# EAGLE board lipol+2xsensor+action (EAGLE 7.2.0)
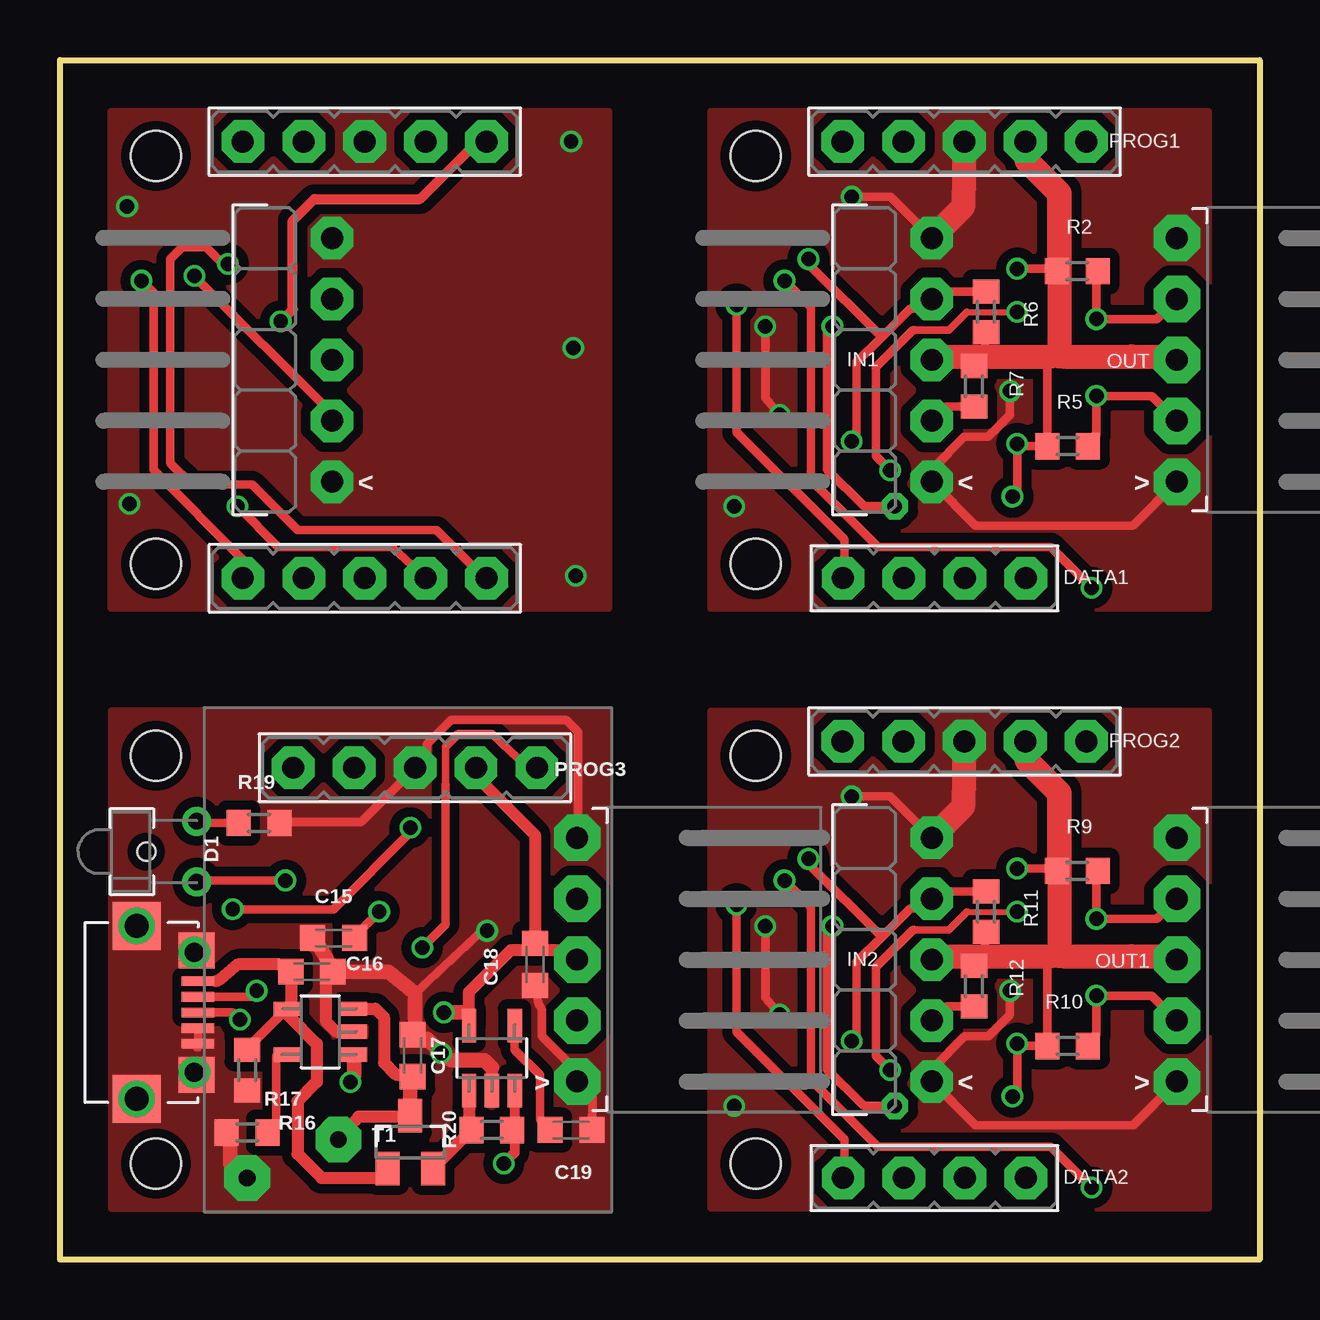
[diagram p0: board, top side]
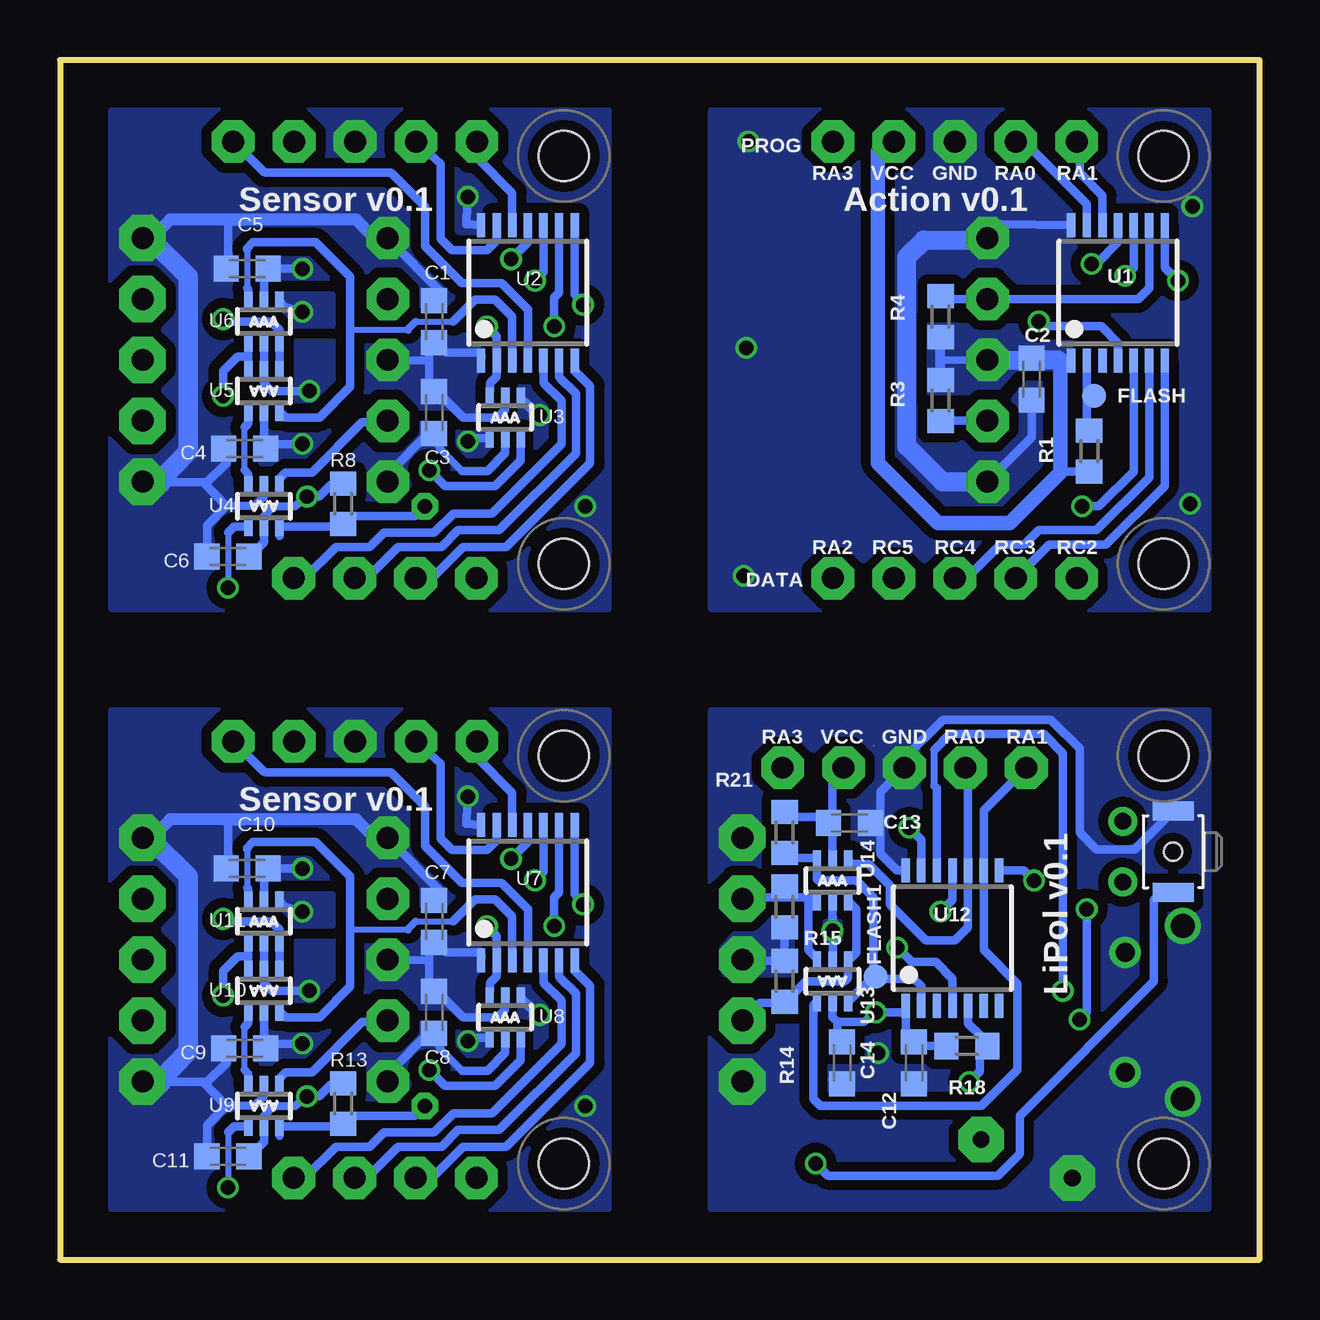
[diagram p1: board, bottom side, seen from below]

Size 50 x 50 mm. Coordinates in mm from the lower left corner, seen from the top.
Outline: 0,0 0,50 50,50 50,0 0,0
Copper layers (1*16): Top 0.035mm / dielectric 1.5mm / Bottom 0.035mm
Design rules "SeeedStudio_2layer_DRU_no_angle_20140221": minimum track width 6mil, minimum drill 12mil, track to track 6mil, track to pad 6mil, pad to pad 6mil, via to via 6mil, smd to smd 0mil, copper to edge 10mil, drill to drill 10mil, minimum pad ring 10mil, minimum via ring 6mil, stop-mask expansion 2mil, vias tented up to drill 100mil, thermal gap 10mil
Holes 2.1 mm at 4,46 4,29 29,46 29,29 29,21 29,4 4,21 4,4

## Footprints (pad centres in the part's own frame; a part is rotated, then mirrored left to right if it is on the bottom)
C0603K = smd 1.05 x 1.08: 1 -0.875,0; 2 0.875,0
LED1.8 = drill 0.7: A -1.27,-0.4; K 1.27,-0.4
JUMPER5M = drill 0.914 pad 1.778 octagon: 1 -5.08,0; 2 -2.54,0; 3 0,0; 4 2.54,0; 5 5.08,0
JUMPER4M = drill 0.914 pad 1.778 octagon: 1 -3.81,0; 2 -1.27,0; 3 1.27,0; 4 3.81,0
TP10R = smd 1 x 1: TP 0,0
JUMPER5M-90 = drill 0.914 pad 1.778 octagon: 1 -5.08,-2.54; 2 -2.54,-2.54; 3 0,-2.54; 4 2.54,-2.54; 5 5.08,-2.54
SOT23-5 = smd 0.6 x 1.1: 1 -0.95,-1.45; 2 0,-1.45; 3 0.95,-1.45; 4 0.95,1.35; 5 -0.95,1.35
JUMPER5F-90 = drill 0.914 pad 1.93 octagon: 1 5.08,-2.54; 2 2.54,-2.54; 3 0,-2.54; 4 -2.54,-2.54; 5 -5.08,-2.54
R0603 = smd 1 x 1.1: 1 -0.85,0; 2 0.85,0
BUTTON-B3U = smd 0.8 x 1.7: P$1 -1.7,0; P$2 1.7,0 | hole 0.75: 0,0
SOT23 = smd 1 x 1.4: D 0,1.1; G -0.95,-1.1; S 0.95,-1.1
SOT32-5 = smd 0.6 x 1.4: BP 0.95,1.35; GND 0,-1.35; SHDN 0.95,-1.35; VIN -0.95,-1.35; VOUT -0.95,1.35
TSSOP14 = smd 0.35 x 1: 1 -1.95,-2.825; 2 -1.3,-2.825; 3 -0.65,-2.825; 4 0,-2.825; 5 0.65,-2.825; 6 1.3,-2.825; 7 1.95,-2.825; 8 1.95,2.825; 9 1.3,2.825; 10 0.65,2.825; 11 0,2.825; 12 -0.65,2.825; 13 -1.3,2.825; 14 -1.95,2.825
SC70-6L = smd 0.35 x 0.8: 1 -0.65,-0.85; 2 0,-0.85; 3 0.65,-0.85; 4 0.65,0.85; 5 0,0.85; 6 -0.65,0.85
LIPOL_21X17 = drill 0.7 pad 1.9 octagon: GND 6.3,9.7; VBAT 2.5,8.1
MICROUSB-MOLEX = smd 0.4 x 1.35: D+ 0,2.35; D- -0.65,2.35; GND 1.3,2.35; NC 0.65,2.35; VUSB -1.3,2.35 | smd 2 x 2: GND1 -3.6,-0.2; GND2 3.6,-0.2 | smd 1.5 x 1.5: GND3 -2.59,2.3; GND4 2.6,2.3 | drill 1: P$1 -3.6,-0.2; P$2 3.6,-0.2 | drill 0.8: P$3 -2.5,2.2; P$6 2.5,2.2

## Placement (x,y rotation side)
C1  100n  [C0603K]  34.4,39.1 90 bottom
C2  100n  [C0603K]  9.5,36.7 270 bottom
C3  100n  [C0603K]  34.4,35.3 270 bottom
C4  100n  [C0603K]  42.3,33.8 0 bottom
C5  100n  [C0603K]  42.2,41.3 0 bottom
C6  100n  [C0603K]  43,29.3 180 bottom
C7  100n  [C0603K]  34.4,14.1 90 bottom
C8  100n  [C0603K]  34.4,10.3 270 bottom
C9  100n  [C0603K]  42.3,8.8 0 bottom
C10  100n  [C0603K]  42.2,16.3 0 bottom
C11  100n  [C0603K]  43,4.3 180 bottom
C12  100n  [C0603K]  14.4,8.2 270 bottom
C13  100n  [C0603K]  17.1,18.2 180 bottom
C14  100n  [C0603K]  17.4,8.2 90 bottom
C15  100n  [C0603K]  11.4,13.4 180 top
C16  4.7u  [C0603K]  10.5,12 180 top
C17  4.7u  [C0603K]  14.7,8.5 270 top
C18  4.7u  [C0603K]  19.8,12.3 90 top
C19  470p  [C0603K]  21.3,5.4 180 top
D1  LED1.8  [LED1.8]  5.3,17 90 top
DATA  JUMPER5M  [JUMPER5M]  12.7,28.4 0 top
DATA1  JUMPER4M  [JUMPER4M]  36.45,28.4 0 top
DATA2  JUMPER4M  [JUMPER4M]  36.45,3.4 0 top
FLASH  TPTP10R  [TP10R]  6.9,36 0 bottom
FLASH1  TPTP10R  [TP10R]  16,11.8 0 bottom
IN  JUMPER5M-90  [JUMPER5M-90]  8.8,37.5 90 top
IN1  JUMPER5M-90  [JUMPER5M-90]  33.8,37.5 90 top
IN2  JUMPER5M-90  [JUMPER5M-90]  33.8,12.5 90 top
MCP73832  MCP73831  [SOT23-5]  10.8,9.5 90 top
OUT  JUMPER5F-90  [JUMPER5F-90]  49.1,37.5 270 top
OUT1  JUMPER5F-90  [JUMPER5F-90]  49.1,12.5 270 top
OUT2  JUMPER5F-90  [JUMPER5F-90]  24.1,12.5 270 top
PROG  JUMPER5M  [JUMPER5M]  12.7,46.6 180 top
PROG1  JUMPER5M  [JUMPER5M]  37.7,46.6 180 top
PROG2  JUMPER5M  [JUMPER5M]  37.7,21.6 180 top
PROG3  JUMPER5M  [JUMPER5M]  14.8,20.5 180 top
R1  100k  [R0603]  7.1,33.7 90 bottom
R2  2k2  [R0603]  42.4,41.2 180 top
R3  2K2  [R0603]  13.3,35.8 90 bottom
R4  2k2  [R0603]  13.3,39.3 270 bottom
R5  2k2  [R0603]  42,33.9 180 top
R6  2K2  [R0603]  38.6,39.5 270 top
R7  2k2  [R0603]  38.1,36.4 90 top
R8  100k  [R0603]  38.2,31.5 90 bottom
R9  2k2  [R0603]  42.4,16.2 180 top
R10  2k2  [R0603]  42,8.9 180 top
R11  2K2  [R0603]  38.6,14.5 270 top
R12  2k2  [R0603]  38.1,11.4 90 top
R13  100k  [R0603]  38.2,6.5 90 bottom
R14  2k2  [R0603]  19.8,11.6 90 bottom
R15  2k2  [R0603]  19.8,14.7 270 bottom
R16  22k  [R0603]  7.8,5.3 0 top
R17  100k  [R0603]  7.8,7.9 90 top
R18  100k  [R0603]  12.2,8.9 0 bottom
R19  2k2  [R0603]  8.3,18.2 180 top
R20  100k  [R0603]  18,5.4 0 top
R21  100k  [R0603]  19.8,17.8 270 bottom
RESET  BYTTON-B3U  [BUTTON-B3U]  3.6,17 270 bottom
T1  FDV304P  [SOT23]  14.6,4.9 0 top
TC1185  TC1185  [SOT32-5]  18,8.4 0 top
U1  16F103  [TSSOP14]  5.9,40.3 0 bottom
U2  16F103  [TSSOP14]  30.5,40.3 0 bottom
U3  NC7SB3157P6X  [SC70-6L]  31.45,35.1 0 bottom
U4  NC7SB3157P6X  [SC70-6L]  41.5,31.4 180 bottom
U5  NC7SB3157P6X  [SC70-6L]  41.5,36.2 180 bottom
U6  NC7SB3157P6X  [SC70-6L]  41.5,39.1 0 bottom
U7  16F103  [TSSOP14]  30.5,15.3 0 bottom
U8  NC7SB3157P6X  [SC70-6L]  31.45,10.1 0 bottom
U9  NC7SB3157P6X  [SC70-6L]  41.5,6.4 180 bottom
U10  NC7SB3157P6X  [SC70-6L]  41.5,11.2 180 bottom
U11  NC7SB3157P6X  [SC70-6L]  41.5,14.1 0 bottom
U12  16F1454  [TSSOP14]  12.8,13.4 0 bottom
U13  NC7SB3157P6X  [SC70-6L]  17.8,11.6 180 bottom
U14  NC7SB3157P6X  [SC70-6L]  17.8,15.8 0 bottom
U$3  LIPOL_21X17  [LIPOL_21X17]  14.1,13.1 180 top
USB  USBMICRO  [MICROUSB-MOLEX]  3.4,10.3 270 top

## Library data of the parts
C1-C19 R1-R21 = resistor
D1 DATA DATA1 DATA2 IN IN1 IN2 MCP73832 OUT OUT1 OUT2 PROG PROG1-PROG3 RESET T1 TC1185 U1-U14 U$3 USB = !stavebnice03
FLASH FLASH1 = testpad

## Nets
GND: C2.2 IN.1 IN.5 PROG.3 U1.14
GND11: C1.2 C3.2 C4.1 C5.1 C6.2 IN1.1 IN1.5 OUT.1 OUT.5 PROG1.3 U2.14 U3.2 U4.2 U5.2 U6.2
GND12: C7.2 C8.2 C9.1 C10.1 C11.2 IN2.1 IN2.5 OUT1.1 OUT1.5 PROG2.3 U7.14 U8.2 U9.2 U10.2 U11.2
GND13: C12.2 C13.1 C14.1 C15.2 C16.1 C17.1 C18.1 C19.1 MCP73832.2 OUT2.1 OUT2.5 PROG3.3 R16.1 R17.1 R19.1 RESET.P$1 TC1185.GND U12.14 U13.2 U14.2 U$3.GND USB.GND USB.GND1 USB.GND2 USB.GND3 USB.GND4 USB.NC USB.P$1 USB.P$2 USB.P$3 USB.P$6
N$2: IN.2 R3.1 U1.10
N$3: DATA.2 U1.7
N$4: FLASH.TP R1.2 U1.2
N$5: IN.4 R4.1 U1.9
N$6: PROG1.1 U2.4
N$7: PROG1.4 U2.13
N$9: PROG1.5 U2.12
N$10: IN1.4 R6.1 U2.11 U3.1
N$11: DATA.5 U1.11
N$12: DATA.4 U1.5
N$13: PROG.1 U1.4
N$14: PROG.4 U1.13
N$15: PROG.5 U1.12
N$17: DATA.3 U1.6
N$18: DATA.1 U1.8
N$20: DATA1.1 U2.8
N$21: DATA1.3 U2.6
N$22: DATA1.4 U2.5
N$23: R8.1 U2.2 U3.6 U4.6
N$24: OUT.2 R5.1 U5.3 U6.1
N$25: OUT.4 R2.1 U5.1 U6.3
N$26: IN1.2 R7.1 U4.1
N$27: U4.3 U5.4
N$28: U3.3 U6.4
N$29: U2.3 U5.6 U6.6
N$31: U2.10 U4.4
N$33: U2.9 U3.4
N$34: DATA1.2 U2.7
N$35: PROG2.1 U7.4
N$36: PROG2.4 U7.13
N$37: PROG2.5 U7.12
N$38: IN2.4 R11.1 U7.11 U8.1
N$39: DATA2.1 U7.8
N$40: DATA2.3 U7.6
N$41: DATA2.4 U7.5
N$42: R13.1 U7.2 U8.6 U9.6
N$43: OUT1.2 R10.1 U10.3 U11.1
N$44: OUT1.4 R9.1 U10.1 U11.3
N$45: IN2.2 R12.1 U9.1
N$46: U9.3 U10.4
N$47: U8.3 U11.4
N$48: U7.3 U10.6 U11.6
N$49: U7.10 U9.4
N$50: U7.9 U8.4
N$51: DATA2.2 U7.7
N$52: OUT2.4 R15.1 U13.3 U14.1
N$53: OUT2.2 R14.1 U13.1 U14.3
N$54: PROG3.5 U12.9 U13.4
N$55: FLASH1.TP R21.2 U12.2 U13.6 U14.6
N$56: U12.12 USB.D-
N$57: U12.13 USB.D+
N$58: C15.1 U12.11
N$59: PROG3.4 U12.10 U14.4
N$60: C17.2 MCP73832.3 T1.D U$3.VBAT
N$61: C16.2 MCP73832.4 R17.2 T1.G USB.VUSB
N$62: MCP73832.5 R16.2
N$63: R20.1 T1.S TC1185.VIN
N$64: MCP73832.1 R18.2 U12.5
N$65: PROG3.1 U12.4
N$66: D1.K R19.2
N$67: D1.A U12.8
N$68: C19.2 TC1185.BP
N$69: R20.2 RESET.P$2 TC1185.SHDN
VCC: C2.1 IN.3 PROG.2 R1.1 R3.2 R4.2 U1.1
VCC1: C1.1 C3.1 C4.2 C5.2 C6.1 IN1.3 OUT.3 PROG1.2 R2.2 R5.2 R6.2 R7.2 R8.2 U2.1 U3.5 U4.5 U5.5 U6.5
VCC2: C7.1 C8.1 C9.2 C10.2 C11.1 IN2.3 OUT1.3 PROG2.2 R9.2 R10.2 R11.2 R12.2 R13.2 U7.1 U8.5 U9.5 U10.5 U11.5
VCC3: C12.1 C13.2 C14.2 C18.2 OUT2.3 PROG3.2 R14.2 R15.2 R18.1 R21.1 TC1185.VOUT U12.1 U13.5 U14.5

## Tracks (layer width: path | path; a pad name or v marks a point on that pad's centre or on a via)
GND  (via drill 0.6)
  Bottom 0.356: C2.2 9.5,34.28 IN.1 | 11.5,42.5 11.4,42.6 | U1.14 10.78,43.16 IN.5
  Bottom 0.8: 11.5,42.5 14,42.5 14.7,41.8 14.7,33.9 13.22,32.42 IN.1
  other vias: 2.9,31.5 21.4,38 21.3,46.6 21.5,28.5 2.8,43.9
  pour Top (isolate 0.406, rank 2, no thermals): 2.1,27.1 2.1,47.9 22.9,47.9 22.9,27.1
  pour Bottom (isolate 0.406, rank 2, no thermals): 2.1,27.1 2.1,47.9 22.9,47.9 22.9,27.1
GND11  (via drill 0.6)
  Top 0.356: v33,44.3 34.61,44.29 IN1.5 | 46.7,32.38 OUT.1 44.74,30.6 38.16,30.6 IN1.1 36.4,32.48 36.4,33 37.7,34.3 38.7,34.3 39.6,35.2 v39.6,36.2
  Top 1: PROG1.3 37.65,43.89 IN1.5
  Bottom 0.305: 33.25,32.87 34.14,33.77
  Bottom 0.33: 41.5,31.8 41.9,31.4
  Bottom 0.34: U4.2 41.5,31.8 | 41.9,31.4 43.08,31.4
  Bottom 0.356: U6.2 U5.2 41.49,36.52 41.17,36.2 v39.6,36.2 | C4.1 43.06,33.2 43.87,32.4 44.03,32.4 | 44.03,32.4 45.89,32.4 | U2.14 33.06,43.16 v33,44.3 | 44.03,32.4 43.08,31.4 43.88,30.6 C6.2 | U3.2 31.45,33.61 32.18,32.87 33.25,32.87 | 34.14,33.77 C3.2 34.68,34.41 36.21,32.87 IN1.1 | C1.2 34.04,40.23 IN1.5 | C5.1 43,41.35 43,43.35
  Bottom 0.5: 42.28,43.35 37.65,43.35 36.88,42.58 | 42.28,43.35 43,43.35 45.41,43.35 46.27,42.5 | 42.97,43.35 42.28,43.35
  Bottom 0.8: 44.66,40.97 46.19,42.5 46.27,42.5 46.6,42.5
  Bottom 0.813: 44.66,40.97 44.66,33.67 45.89,32.4
  Bottom 1.016: 45.89,32.4 OUT.1
  other vias: 28.1,31.4
  pour Top (isolate 0.42, rank 3, no thermals): 27.1,27.1 27.1,47.9 47.9,47.9 47.9,27.1
  pour Bottom (isolate 0.43, rank 2, no thermals): 27.1,27.1 27.1,47.9 47.9,47.9 47.9,27.1
GND12  (via drill 0.6)
  Top 0.356: v33,19.3 34.61,19.29 IN2.5 | 46.7,7.38 OUT1.1 44.74,5.6 38.16,5.6 IN2.1 36.4,7.48 36.4,8 37.7,9.3 38.7,9.3 39.6,10.2 v39.6,11.2
  Top 1: PROG2.3 37.65,18.89 IN2.5
  Bottom 0.305: 33.25,7.87 34.14,8.77
  Bottom 0.33: 41.5,6.8 41.9,6.4
  Bottom 0.34: U9.2 41.5,6.8 | 41.9,6.4 43.08,6.4
  Bottom 0.356: U11.2 U10.2 41.49,11.53 41.17,11.2 v39.6,11.2 | C9.1 43.06,8.21 43.87,7.4 44.03,7.4 | 44.03,7.4 45.89,7.4 | U7.14 33.06,18.16 v33,19.3 | 44.03,7.4 43.08,6.4 43.88,5.6 C11.2 | U8.2 31.45,8.61 32.18,7.87 33.25,7.87 | 34.14,8.77 C8.2 34.68,9.4 36.21,7.87 IN2.1 | C7.2 34.04,15.23 IN2.5 | C10.1 43,16.35 43,18.35
  Bottom 0.5: 42.28,18.35 37.65,18.35 36.88,17.58 | 42.28,18.35 43,18.35 45.41,18.35 46.27,17.5 | 42.97,18.35 42.28,18.35
  Bottom 0.8: 44.66,15.97 46.19,17.5 46.27,17.5 46.6,17.5
  Bottom 0.813: 44.66,15.97 44.66,8.67 45.89,7.4
  Bottom 1.016: 45.89,7.4 OUT1.1
  other vias: 28.1,6.4
  pour Top (isolate 0.42, rank 3, no thermals): 27.1,2.1 27.1,22.9 47.9,22.9 47.9,2.1
  pour Bottom (isolate 0.43, rank 2, no thermals): 27.1,2.1 27.1,22.9 47.9,22.9 47.9,2.1
GND13  (via drill 0.6)
  Top 0.356: 21.64,7.4 OUT2.1 | 7.03,5.52 R16.1 | 11.1,12.25 C16.1 | v17.8,13.7 17.6,13.7 14.8,11.1 | OUT2.1 21.66,7.74 20.1,9.3 20.1,10.4 19.95,10.65 C18.1 | C19.1 22.2,6.78 OUT2.1 | R19.1 9.2,18.25 12.55,18.25 PROG3.3 15.3,20.9 15.3,21.5 16.3,22.5 21.1,22.5 21.6,22 21.6,17.6 | 5.75,8.85 5.7,8.85 USB.GND USB.NC
  Top 0.5: MCP73832.2 11.5,9.5 11.1,9.9 11.1,12.25 | TC1185.GND 18,8
  Top 0.6: U$3.GND 7.1,4 7.1,5.52 7.03,5.52 | C15.2 10.55,13.45 11.1,12.6 11.1,12.55 C16.1 13.7,12 14.8,11.1 14.8,9.47 | 18,8 17.7,8.3 16.3,8.3 v15.9,8.6 15.3,9.2 14.8,9.2 14.8,9.47 | 14.8,9.47 C17.1
  Bottom 0.356: C14.1 17.15,7.45 | U12.14 15.12,16.23 15.8,16.9 15.8,19.5 PROG3.3 14.8,20.9 13.2,22.5 8.7,22.5 7.5,21.3 7.5,17.8 6.8,17.1 5.2,17.1 RESET.P$1 3.5,18.6
  Bottom 0.357: v17.8,13.7 17.79,12.81 U14.2 17.79,13.71 v17.8,13.7 | U13.2 17.79,12.79 v17.8,13.7 | C14.1 17.8,7.5
  pour Bottom (isolate 0.41, rank 2, no thermals): 2.1,2.1 2.1,22.9 22.9,22.9 22.9,2.1
  pour Top (isolate 0.4, rank 2, no thermals): 2.1,2.1 22.9,2.1 22.9,22.9 2.1,22.9
N$2  (via drill 0.6)
  Top 0.356: IN.2 11.34,35.26 v5.6,41
  Bottom 0.356: IN.2 R3.1 | U1.10 5.25,41.35 v5.6,41
  Bottom 0.406: R3.1
N$3
  Bottom 0.35: 6.4,29.8 8.76,29.8 DATA.2
  Bottom 0.356: U1.7 3.95,32.25 6.4,29.8
N$4
  Bottom 0.356: R1.2 7.05,34.55 7.2,34.7 7.2,35.8 | 7.2,35.8 U1.2 | FLASH.TP 7.1,35.9 7.2,35.8
N$5
  Bottom 0.356: U1.9 4.6,40.5 5.06,40.04 IN.4 13.19,40.04 R4.1
N$6
  Bottom 0.35: 41.5,45.32 PROG1.1
  Bottom 0.356: U2.4 30.5,39.61 30.51,39.61 31.6,40.7 33.24,40.7 34.78,42.24 | 41.4,45.3 41.5,45.32
  Bottom 0.357: 34.78,42.24 34.78,43.88 36.2,45.3 41.4,45.3
N$7
  Bottom 0.35: 34.14,45.63 34.14,45.68 PROG1.4
  Bottom 0.356: 34.14,45.63 34.14,42.56 33.65,42.06 32.2,42.06 31.8,42.46 U2.13
N$9
  Bottom 0.356: U2.12 31.15,44.45 32.6,45.9 32.6,46.63 PROG1.5
N$10  (via drill 0.6)
  Top 0.356: R6.1 36.65,40.35 IN1.4 35.94,39.64 35.44,39.64 34.25,38.45 | 34.25,38.45 33.2,37.4 33.2,34.3 v33,34.1 | v31.2,41.7 31.2,41.5 34.25,38.45
  Bottom 0.356: U3.1 32.65,34.25 v33,34.1 | U2.11 30.5,42.4 v31.2,41.7
  pour Bottom (isolate 0.356, no thermals): 31.9,34.6 31.9,33.6 32.1,33.4 33.2,33.4 33.5,33.7 33.5,34.6
N$11  (via drill 0.6)
  Top 0.35: 15.7,30.4 17.78,28.32 DATA.5
  Top 0.356: 15.7,30.4 9.9,30.4 8,32.3 5.5,32.3 4.6,33.2 4.6,41.7 5.1,42.2 6.1,42.2 6.8,41.5 v7,41.5
  Bottom 0.356: U1.11 5.9,42.4 6.8,41.5 v7,41.5
N$12  (via drill 0.6)
  Top 0.35: 9.1,29.7 13.84,29.7 DATA.4
  Top 0.356: v7.4,31.4 9.1,29.7
  Bottom 0.356: U1.5 5.25,32.85 6.7,31.4 v7.4,31.4
N$13  (via drill 0.6)
  Top 0.406: v9.2,39.1 9.7,39.6 9.7,43.3 10.6,44.2 15,44.2 17.3,46.5 17.58,46.5 PROG.1
  Bottom 0.356: U1.4 5.9,38.2 6.6,38.9 9,38.9 v9.2,39.1
N$14
  Bottom 0.35: 7.8,44.6 9.8,46.6 PROG.4
  Bottom 0.356: 7.8,44.6 7.2,44 U1.13
N$15
  Bottom 0.356: U1.12 6.55,44.35 7.5,45.3 7.5,46.48 PROG.5
N$17
  Bottom 0.356: U1.6 4.6,32.6 6.8,30.4 9.2,30.4 9.8,29.8 10.8,29.8 12.2,28.4 DATA.3
N$18  (via drill 0.6)
  Top 0.35: 3.9,32.9 7.62,29.18 DATA.1
  Top 0.356: 3.9,32.9 3.9,40.3 v3.4,40.8
  Bottom 0.356: U1.8 3.95,41.35 v3.4,40.8
N$20  (via drill 0.6)
  Top 0.35: 32.69,30.01 32.69,28.35 DATA1.1
  Top 0.356: 32.69,30.01 28.2,34.5 v28.2,39.8
  Bottom 0.356: U2.8 28.55,40.25 v28.2,39.8
N$21
  Bottom 0.356: 28.5,33.92 28.5,33.6 31.7,30.4 33.4,30.4 34.1,29.7 35.9,29.7 37.2,28.4 DATA1.3 | U2.6 29.2,36.8 29.17,36.77
  Bottom 0.357: 29.17,36.77 28.5,36.1 28.5,33.92
N$22
  Bottom 0.356: U2.5 29.85,36.55 29.82,36.52 | 29.1,34 32,31.1 33.6,31.1 34.4,30.3 36.5,30.3 37.1,29.7 38.5,29.7 39.8,28.4 DATA1.4
  Bottom 0.357: 29.1,34 29.1,35.8 29.82,36.52
N$23  (via drill 0.6, 0.6 pad 1.1)
  Top 0.356: v32.2,38.9 31.96,38.76 31.96,32.94 33.5,31.4 v34.8,31.4
  Bottom 0.356: v32.2,38.9 31.8,38.5 U2.2 31.8,36.8 32.08,36.52 32.08,36.28 U3.6 | 40.85,30.15 U4.6 38.6,30.55 R8.1 | 38.25,30.6 R8.1 | R8.1 38.05,30.9 37.9,30.9 37.8,31 35.2,31 v34.8,31.4
N$24  (via drill 0.6)
  Top 0.356: 43.17,34.43 R5.1 43.2,34.35 v43.2,36 45.5,36 46.54,34.96 OUT.2
  Bottom 0.356: v43.2,36 43.2,37.03 42.6,37.64 42.19,37.64 42.15,37.6 | U6.1 42.15,37.6 | 42.15,37.6 U5.3
N$25  (via drill 0.6)
  Top 0.356: OUT.4 46.57,40.06 45.71,39.2 v43.2,39.2 43.2,41.19 R2.1
  Bottom 0.356: U5.1 U6.3 40.85,38.74 41.2,39.1 43.12,39.1 v43.2,39.2
N$26
  Top 0.357: R7.1 36.95,35.55 IN1.2
  Bottom 0.356: U4.1 40.85,32.55 40.6,32.8 39.5,32.8 37.4,34.9 36.4,34.9 IN1.2
N$27
  Bottom 0.254: 42.3,32.9 42.3,34.7
  Bottom 0.356: U5.4 42.15,34.84 42.3,34.7 | U4.3 42.15,32.75 42.3,32.9
N$28  (via drill 0.6)
  Top 0.254: 37.8,39.5 v39.9,39.5
  Top 0.305: 35.61,38.75 37.05,38.75 37.8,39.5
  Top 0.356: 35.61,38.75 35.55,38.75 34,37.2 34,33.5 v34.6,32.9
  Bottom 0.356: v39.9,39.5 40.62,39.7 U6.4 | U3.3 30.8,33.31 31.86,32.24 33.94,32.24 v34.6,32.9
  pour Bottom (isolate 0.406, no thermals): 40.85,40.23 38.64,40.23 38.64,38.91 40.48,38.91 40.85,39.38
N$29
  Bottom 0.254: 35.18,39.1 33.61,39.1 | 35.5,38.75 37.9,38.75 | 42.2,42.1 42.2,40.5
  Bottom 0.304: 35.5,38.75 35.5,38.78
  Bottom 0.305: 35.5,38.78 35.18,39.1
  Bottom 0.356: U2.3 31.15,39.3 31.86,40.02 32.69,40.02 33.61,39.1 | 42.2,42.1 42.2,42.16 41.96,42.4 39.34,42.4 37.91,40.96 37.9,38.75 37.9,36.38 39.18,35.1 40.6,35.1 U5.6 | U6.6 42.15,40.45 42.2,40.5
N$31  (via drill 0.6)
  Top 0.356: v30.2,40.8 31.3,39.7 31.3,32.5 34.1,29.7 | 40.8,29.7 41.3,29.7 v43,28
  Top 0.357: 40.8,29.7 34.1,29.7
  Bottom 0.254: 43,30.3 v43,28
  Bottom 0.356: v30.2,40.8 29.85,41.15 U2.10 | U4.4 42.75,30.55 43,30.3
N$33  (via drill 0.6)
  Top 0.356: v30,35.2 29.4,35.9 v29.4,38.9
  Bottom 0.356: U3.4 30.71,35.79 | U2.9 29.2,40.3 29.4,40.1 v29.4,38.9
  Bottom 0.406: 30.71,35.79 v30,35.2
  pour Bottom (isolate 0.356, no thermals): 29.6,33.64 30.87,33.64 30.97,36.37 29.7,36.37
  pour Top (isolate 0.406, rank 2, no thermals): 28.5,39.5 31.1,39.5 31.1,32.1 28.4,34.4
N$34
  Bottom 0.356: 28.55,37.25 U2.7 28.55,37.05 27.9,36.4 27.9,33.2 | 31.4,29.7 33.2,29.7 34.5,28.4 DATA1.2
  Bottom 0.357: 27.9,33.2 31.4,29.7
N$35
  Bottom 0.35: 41.5,20.32 PROG2.1
  Bottom 0.356: U7.4 30.5,14.61 30.51,14.61 31.6,15.7 33.24,15.7 34.78,17.24 | 41.4,20.3 41.5,20.32
  Bottom 0.357: 34.78,17.24 34.78,18.88 36.2,20.3 41.4,20.3
N$36
  Bottom 0.35: 34.14,20.63 34.14,20.68 PROG2.4
  Bottom 0.356: 34.14,20.63 34.14,17.56 33.65,17.06 32.2,17.06 31.8,17.46 U7.13
N$37
  Bottom 0.356: U7.12 31.15,19.45 32.6,20.9 32.6,21.63 PROG2.5
N$38  (via drill 0.6)
  Top 0.356: R11.1 36.65,15.35 IN2.4 35.94,14.64 35.44,14.64 34.25,13.45 | 34.25,13.45 33.2,12.4 33.2,9.3 v33,9.1 | v31.2,16.7 31.2,16.5 34.25,13.45
  Bottom 0.356: U8.1 32.65,9.25 v33,9.1 | U7.11 30.5,17.4 v31.2,16.7
  pour Bottom (isolate 0.356, no thermals): 31.9,9.6 31.9,8.6 32.1,8.4 33.2,8.4 33.5,8.7 33.5,9.6
N$39  (via drill 0.6)
  Top 0.35: 32.69,5.01 32.69,3.35 DATA2.1
  Top 0.356: 32.69,5.01 28.2,9.5 v28.2,14.8
  Bottom 0.356: U7.8 28.55,15.25 v28.2,14.8
N$40
  Bottom 0.356: 28.5,8.92 28.5,8.6 31.7,5.4 33.4,5.4 34.1,4.7 35.9,4.7 37.2,3.4 DATA2.3 | U7.6 29.2,11.8 29.17,11.77
  Bottom 0.357: 29.17,11.77 28.5,11.1 28.5,8.92
N$41
  Bottom 0.356: U7.5 29.85,11.55 29.82,11.52 | 29.1,9 32,6.1 33.6,6.1 34.4,5.3 36.5,5.3 37.1,4.7 38.5,4.7 39.8,3.4 DATA2.4
  Bottom 0.357: 29.1,9 29.1,10.8 29.82,11.52
N$42  (via drill 0.6, 0.6 pad 1.1)
  Top 0.356: v32.2,13.9 31.96,13.76 31.96,7.94 33.5,6.4 v34.8,6.4
  Bottom 0.356: v32.2,13.9 31.8,13.5 U7.2 31.8,11.8 32.08,11.53 32.08,11.28 U8.6 | 40.85,5.15 U9.6 38.6,5.55 R13.1 | 38.25,5.6 R13.1 | R13.1 38.05,5.9 37.9,5.9 37.8,6 35.2,6 v34.8,6.4
N$43  (via drill 0.6)
  Top 0.356: 43.17,9.43 R10.1 43.2,9.35 v43.2,11 45.5,11 46.54,9.96 OUT1.2
  Bottom 0.356: v43.2,11 43.2,12.04 42.6,12.64 42.19,12.64 42.15,12.6 | U11.1 42.15,12.6 | 42.15,12.6 U10.3
N$44  (via drill 0.6)
  Top 0.356: OUT1.4 46.57,15.06 45.71,14.2 v43.2,14.2 43.2,16.18 R9.1
  Bottom 0.356: U10.1 U11.3 40.85,13.74 41.2,14.1 43.12,14.1 v43.2,14.2
N$45
  Top 0.357: R12.1 36.95,10.55 IN2.2
  Bottom 0.356: U9.1 40.85,7.55 40.6,7.8 39.5,7.8 37.4,9.9 36.4,9.9 IN2.2
N$46
  Bottom 0.254: 42.3,7.9 42.3,9.7
  Bottom 0.356: U10.4 42.15,9.85 42.3,9.7 | U9.3 42.15,7.75 42.3,7.9
N$47  (via drill 0.6)
  Top 0.254: 37.8,14.5 v39.9,14.5
  Top 0.305: 35.61,13.75 37.05,13.75 37.8,14.5
  Top 0.356: 35.61,13.75 35.55,13.75 34,12.2 34,8.5 v34.6,7.9
  Bottom 0.356: v39.9,14.5 40.62,14.7 U11.4 | U8.3 30.8,8.31 31.86,7.24 33.94,7.24 v34.6,7.9
  pour Bottom (isolate 0.406, no thermals): 40.85,15.23 38.64,15.23 38.64,13.91 40.48,13.91 40.85,14.38
N$48
  Bottom 0.254: 35.18,14.1 33.61,14.1 | 35.5,13.75 37.9,13.75 | 42.2,17.1 42.2,15.5
  Bottom 0.304: 35.5,13.75 35.5,13.78
  Bottom 0.305: 35.5,13.78 35.18,14.1
  Bottom 0.356: U7.3 31.15,14.3 31.86,15.02 32.69,15.02 33.61,14.1 | 42.2,17.1 42.2,17.16 41.96,17.4 39.34,17.4 37.91,15.96 37.9,13.75 37.9,11.38 39.18,10.1 40.6,10.1 U10.6 | U11.6 42.15,15.45 42.2,15.5
N$49  (via drill 0.6)
  Top 0.356: v30.2,15.8 31.3,14.7 31.3,7.5 34.1,4.7 | 40.8,4.7 41.3,4.7 v43,3
  Top 0.357: 40.8,4.7 34.1,4.7
  Bottom 0.254: 43,5.3 v43,3
  Bottom 0.356: v30.2,15.8 29.85,16.15 U7.10 | U9.4 42.75,5.55 43,5.3
N$50  (via drill 0.6)
  Top 0.356: v30,10.2 29.4,10.9 v29.4,13.9
  Bottom 0.356: U8.4 30.71,10.79 | U7.9 29.2,15.3 29.4,15.1 v29.4,13.9
  Bottom 0.406: 30.71,10.79 v30,10.2
  pour Bottom (isolate 0.356, no thermals): 29.6,8.64 30.87,8.64 30.97,11.37 29.7,11.37
  pour Top (isolate 0.406, rank 2, no thermals): 28.5,14.5 31.1,14.5 31.1,7.1 28.4,9.4
N$51
  Bottom 0.356: 28.55,12.25 U7.7 28.55,12.05 27.9,11.4 27.9,8.2 | 31.4,4.7 33.2,4.7 34.5,3.4 DATA2.2
  Bottom 0.357: 27.9,8.2 31.4,4.7
N$52
  Bottom 0.356: U13.3 18.45,12.55 18.8,12.9 18.8,15.1 | 18.45,14.85 U14.1 18.6,15.1 18.8,15.1 | 18.8,15.1 19.8,15.1 | 19.8,15.1 21.5,15.1 OUT2.4 | R15.1 19.8,15.1
N$53
  Bottom 0.356: U13.1 17.15,11.75 17.3,11.6 18.9,11.6 19.7,10.8 19.9,10.8 19.95,10.75 R14.1 20.1,10.7 20.82,10.7 OUT2.2
  Bottom 0.357: U14.3 16.8,14.6 16.8,12.79 U13.1
N$54
  Bottom 0.356: U13.4 18.6,10.6 18.6,6.7 18.3,6.4 11.6,6.4 10.1,7.9 10.1,11.5 11.5,12.9 U12.9 11.5,18.72 PROG3.5
N$55
  Bottom 0.356: 18.44,15.84 18.45,15.85 U14.6 18.55,16.75 19.8,16.75 R21.2 | U13.6 16.2,11.7 16.1,11.7 16,11.7 | 16,11.7 14.4,11.7 14.1,11.4 U12.2 | FLASH1.TP 16,11.7
  Bottom 0.357: 18.44,15.84 18.4,15.8 16.8,15.8 16.1,15.1 16.1,11.7
N$56  (via drill 0.6)
  Top 0.356: USB.D- 7.95,10.95 v8.2,11.2
  Bottom 0.3: 13.55,19.75 13.55,21.25
  Bottom 0.356: U12.12 13.45,19.65 13.55,19.75 | 13.55,21.25 12.9,21.9 9,21.9 8.2,21.1 v8.2,11.2
N$57  (via drill 0.6)
  Top 0.356: USB.D+ 7.2,10.3 v7.5,10 | v7.2,14.6 11.4,14.6 14.6,17.8 v14.6,18
  Bottom 0.356: v7.5,10 7.2,10.3 v7.2,14.6 | U12.13 14.1,17.5 v14.6,18
N$58  (via drill 0.6)
  Top 0.357: C15.1 12.5,13.7 v13.3,14.5
  Bottom 0.357: U12.11 12.8,15 v13.3,14.5
N$59
  Bottom 0.356: 17.1,16.6 U14.4 17,16.5 16.3,16.5 15.4,15.6 15.4,14.8 13.9,13.3 12.7,13.3 12.15,13.85 U12.10 12.15,20.3 | 12.15,20.3 12.15,20.39 | PROG3.4 12.15,20.3
N$60
  Top 0.5: MCP73832.3 13.15,10.45 13.5,10.1 13.5,8.2 13.97,7.72 C17.2 | 14.35,5.95 12.44,5.95 U$3.VBAT
  Top 0.6: C17.2 14.7,7.7 14.6,7.6 T1.D 14.35,6 14.35,5.95
N$61
  Top 0.356: R17.2 7.9,8.8
  Top 0.4: 9.15,12.3 C16.2 | 6.5,11.6 USB.VUSB
  Top 0.406: 7.9,8.8 7.9,8.9 MCP73832.4
  Top 0.5: 9.15,12.3 7.4,12.3 6.7,11.7 6.5,11.6 | 13.3,3.4 10.9,3.4 9.9,4.4 9.9,6.6 10.7,7.4 10.7,9 9.5,10.2 9.5,10.4 | C16.2 9.62,10.62
  Top 0.6: MCP73832.4 9.35,10.45 | 13.3,3.4 T1.G | 9.62,10.62 MCP73832.4 | 9.5,10.4 MCP73832.4
N$62
  Top 0.356: 8.85,5.6 R16.2 | 9,8.5 9.7,8.5 MCP73832.5
  Top 0.357: 9,8.5 9,5.6 8.85,5.6
N$63
  Top 0.5: R20.1 T1.S | TC1185.VIN 17.05,5.4
  Top 0.6: 17.05,5.4 R20.1
N$64  (via drill 0.6)
  Top 0.356: 12.25,7.65 v12.1,7.4
  Top 0.6: 12.25,7.65 MCP73832.1
  Bottom 0.356: 11.4,8.9 R18.2 | v12.1,7.4 11.65,7.85 11.65,8.4 R18.2 | U12.5 12.15,9.85 11.6,9.3 11.6,9.15 R18.2
N$65  (via drill 0.6)  (1 unrouted)
  Top 0.305: 16.07,21.4 16.07,19.8
  Top 0.356: 16.6,21.9 18,21.9 19.48,20.52 PROG3.1 | 16.07,19.8 16.07,13.97 v15.1,13
  Top 0.357: 16.1,21.4 16.6,21.9
  Bottom 0.356: v15.1,13 14.5,12.4 13.5,12.4 12.8,11.7 U12.4
N$66
  Top 0.356: 7.48,18.17 R19.2 5.77,18.2 D1.K
N$67  (via drill 0.6)
  Top 0.356: v9.4,15.8 5.77,15.8 D1.A
  Bottom 0.356: v9.39,15.8 v9.4,15.8 9.82,16.23 U12.8
N$68
  Top 0.356: TC1185.BP 18.95,8.75 20,7.7 20,5.85 C19.2
N$69  (via drill 0.6)
  Top 0.356: TC1185.SHDN 18.95,5.2 R20.2
  Top 0.406: TC1185.SHDN 18.95,4.45 v18.5,4
  Bottom 0.356: v18.5,4 18,3.5 10.9,3.5 10,4.4 10,6 4.4,11.6 4.4,15 3.9,15.5 RESET.P$2
VCC
  Bottom 0.305: IN.3 13.2,37.5 13.3,37.4
  Bottom 0.356: 9.22,37.5 C2.1 9.18,37.51 | 7.89,37.49 7.9,37.5 U1.1 8.22,37.48 8.3,37.3 | R1.1 8.25,32.85 8.3,34.4
  Bottom 0.406: R3.2 13.3,37.4 R4.2
  Bottom 0.6: 8.3,37.3 8.3,34.4 8.3,32.8 10.4,30.7 13.4,30.7 15.9,33.2 15.9,46.19 15.49,46.6 PROG.2
  Bottom 0.8: IN.3 9.22,37.5 | 8.3,37.3 8.4,37.5 9.45,37.5 C2.1
  pour Bottom (isolate 0.406, no thermals): 13.9,38.9 13.9,36.2 11.1,36.2 10.2,37.2 8,37.2 7.4,37.8 7.4,38.8
VCC1  (via drill 0.6)
  Top 0.356: 41.65,41.13 41.65,40.81 | 44.4,37.43 44.66,37.64 | 41.65,40.97 41.55,41.06 R2.2 41.5,41.2 41.4,41.3 v39.9,41.3 | 41.33,37.64 41.58,37.41 41.15,37.44 R5.2 40,33.9 v39.9,34 39.9,32 v39.7,31.8
  Top 0.357: R6.2 38.5,37.74 38.6,37.64 38.5,37.54 R7.2
  Top 0.813: 36.37,37.48 36.52,37.64 | 41.33,37.64 41.65,37.64 41.8,37.64 | 46.71,37.64 46.79,37.48 OUT.3
  Top 1: 36.52,37.64 38.6,37.64 41.33,37.64 | 41.8,37.64 44.66,37.64 46.71,37.64 | 41.65,40.81 41.65,37.64
  Top 1.016: 41.65,40.81 41.65,40.97 41.65,41.13 41.65,44.45 40.3,45.8 40.3,46.69 PROG1.2
  Top 1.27: IN1.3 36.37,37.48
  Bottom 0.33: 41.5,31 41.1,31.4
  Bottom 0.34: 41.1,31.4 40.2,31.4 | U4.5 41.5,31
  Bottom 0.356: C5.2 41.17,40.97 | IN1.3 34.62,37.48 | 34.62,37.48 34.62,37.92 C1.1 33.91,37.8 32.56,37.8 32.42,37.66 U2.1 | 34.62,37.48 34.62,36.1 C3.1 34.41,35.89 33.98,35.89 33.19,35.1 31.76,35.1 31.45,35.41 U3.5 | U6.5 41.5,41.15 C5.2 | U5.5 41.5,33.95 C4.2 41.23,34 v39.9,34 | 40.2,31.4 v39.7,31.8 39.2,31.8 38.7,32.3 38.25,32.3 R8.2 | v39.9,41.3 C5.2 | C6.1 42.1,29.3 41.5,29.9 U4.5
  pour Bottom (isolate 0.42, no thermals): 32.56,38.75 36.63,38.75 37.4,38.69 37.4,36.2 35.8,36.2 34.9,35.3 32.56,35.3
  pour Bottom (isolate 0.406, no thermals): 41.6,33.15 39.97,33.15 38.49,34.52 41.58,34.52
  pour Bottom (isolate 0.406, no thermals): 40.91,40.91 40.91,42.08 40.04,42.08 39.78,41.82 38.78,40.91
VCC2  (via drill 0.6)
  Top 0.356: 41.65,16.13 41.65,15.81 | 44.4,12.43 44.66,12.64 | 41.65,15.97 41.55,16.06 R9.2 41.5,16.2 41.4,16.3 v39.9,16.3 | 41.33,12.64 41.58,12.41 41.15,12.44 R10.2 40,8.9 v39.9,9 39.9,7 v39.7,6.8
  Top 0.357: R11.2 38.5,12.74 38.6,12.64 38.5,12.54 R12.2
  Top 0.813: 36.37,12.48 36.52,12.64 | 41.33,12.64 41.65,12.64 41.8,12.64 | 46.71,12.64 46.79,12.48 OUT1.3
  Top 1: 36.52,12.64 38.6,12.64 41.33,12.64 | 41.8,12.64 44.66,12.64 46.71,12.64 | 41.65,15.81 41.65,12.64
  Top 1.016: 41.65,15.81 41.65,15.97 41.65,16.13 41.65,19.45 40.3,20.8 40.3,21.69 PROG2.2
  Top 1.27: IN2.3 36.37,12.48
  Bottom 0.33: 41.5,6 41.1,6.4
  Bottom 0.34: 41.1,6.4 40.2,6.4 | U9.5 41.5,6
  Bottom 0.356: C10.2 41.17,15.97 | IN2.3 34.62,12.48 | 34.62,12.48 34.62,12.92 C7.1 33.91,12.79 32.56,12.79 32.42,12.66 U7.1 | 34.62,12.48 34.62,11.11 C8.1 34.41,10.89 33.98,10.89 33.19,10.1 31.76,10.1 31.45,10.41 U8.5 | U11.5 41.5,16.15 C10.2 | U10.5 41.5,8.95 C9.2 41.23,9 v39.9,9 | 40.2,6.4 v39.7,6.8 39.2,6.8 38.7,7.3 38.25,7.3 R13.2 | v39.9,16.3 C10.2 | C11.1 42.1,4.3 41.5,4.9 U9.5
  pour Bottom (isolate 0.42, no thermals): 32.56,13.75 36.63,13.75 37.4,13.69 37.4,11.2 35.8,11.2 34.9,10.3 32.56,10.3
  pour Bottom (isolate 0.406, no thermals): 41.6,8.15 39.97,8.15 38.49,9.52 41.58,9.52
  pour Bottom (isolate 0.406, no thermals): 40.91,15.91 40.91,17.08 40.04,17.08 39.78,16.82 38.78,15.91
VCC3  (via drill 0.6)
  Top 0.356: C18.2 19.95,13.15 20.2,12.9
  Top 0.5: C18.2 19.8,17.7 17.4,20.1 17.4,20.5 | OUT2.3 21.16,12.9 20.2,12.9 18.8,12.9 17.05,11.15 17.05,10.3
  Top 0.6: TC1185.VOUT 17.05,10.3 v16,10.3 | 17.4,20.5 PROG3.2
  Bottom 0.356: U12.1 14.75,10.3 | v16,10.3 14.75,10.3 | U14.5 17.8,17.85 C13.2 | R18.1 14.55,8.9 C12.1 14.75,9.07 14.75,10.3 | C13.2 17.7,17.9 | OUT2.3 21.51,12.45 R14.2 R15.2 | U13.5 17.8,10.1 17.6,9.9 | 17.5,20.2 PROG3.2 | 19.8,18.5 R21.1 19.8,18.45 18.23,18.45 C13.2
  Bottom 0.357: 17.79,17.83 C13.2 | C14.2 17.6,9 17.6,9.9 16.5,9.9 v16,10.3 | 17.85,17.9 C13.2 | C13.2 17.8,17.9 17.8,20 17.5,20.2
  pour Bottom (isolate 0.4, no thermals): 19.5,14.2 21.3,14.2 22.4,13 22.4,12.2 22.3,11.9 19.5,11.9

## Text on the board
bPlace: RA1 | RA0 | GND | VCC | RA3 | Action v0.1 | Sensor v0.1 | RC2 | RC3 | RC4 | RC5 | RA2 | RA1 | RA0 | GND | VCC | RA3 | Sensor v0.1 | LiPol v0.1
bValues: RA1 | RA0 | GND | VCC | RA3 | FLASH | RC2 | RC3 | RC4 | RC5 | RA1 | RA0 | GND | VCC | RA3 | FLASH | RC2 | RC3 | RC4 | RC5